# Altium PCB _PCB_2L.PcbDoc
Units mm, origin at the board's own origin, x right, y up, seen from the top; angles counter-clockwise.
Board outline 75 x 100 mm, 2 copper layers (Top Layer, Bottom Layer), stack 1.57 mm thick; 12 components, 1 nets, 12 pads, 0 vias.
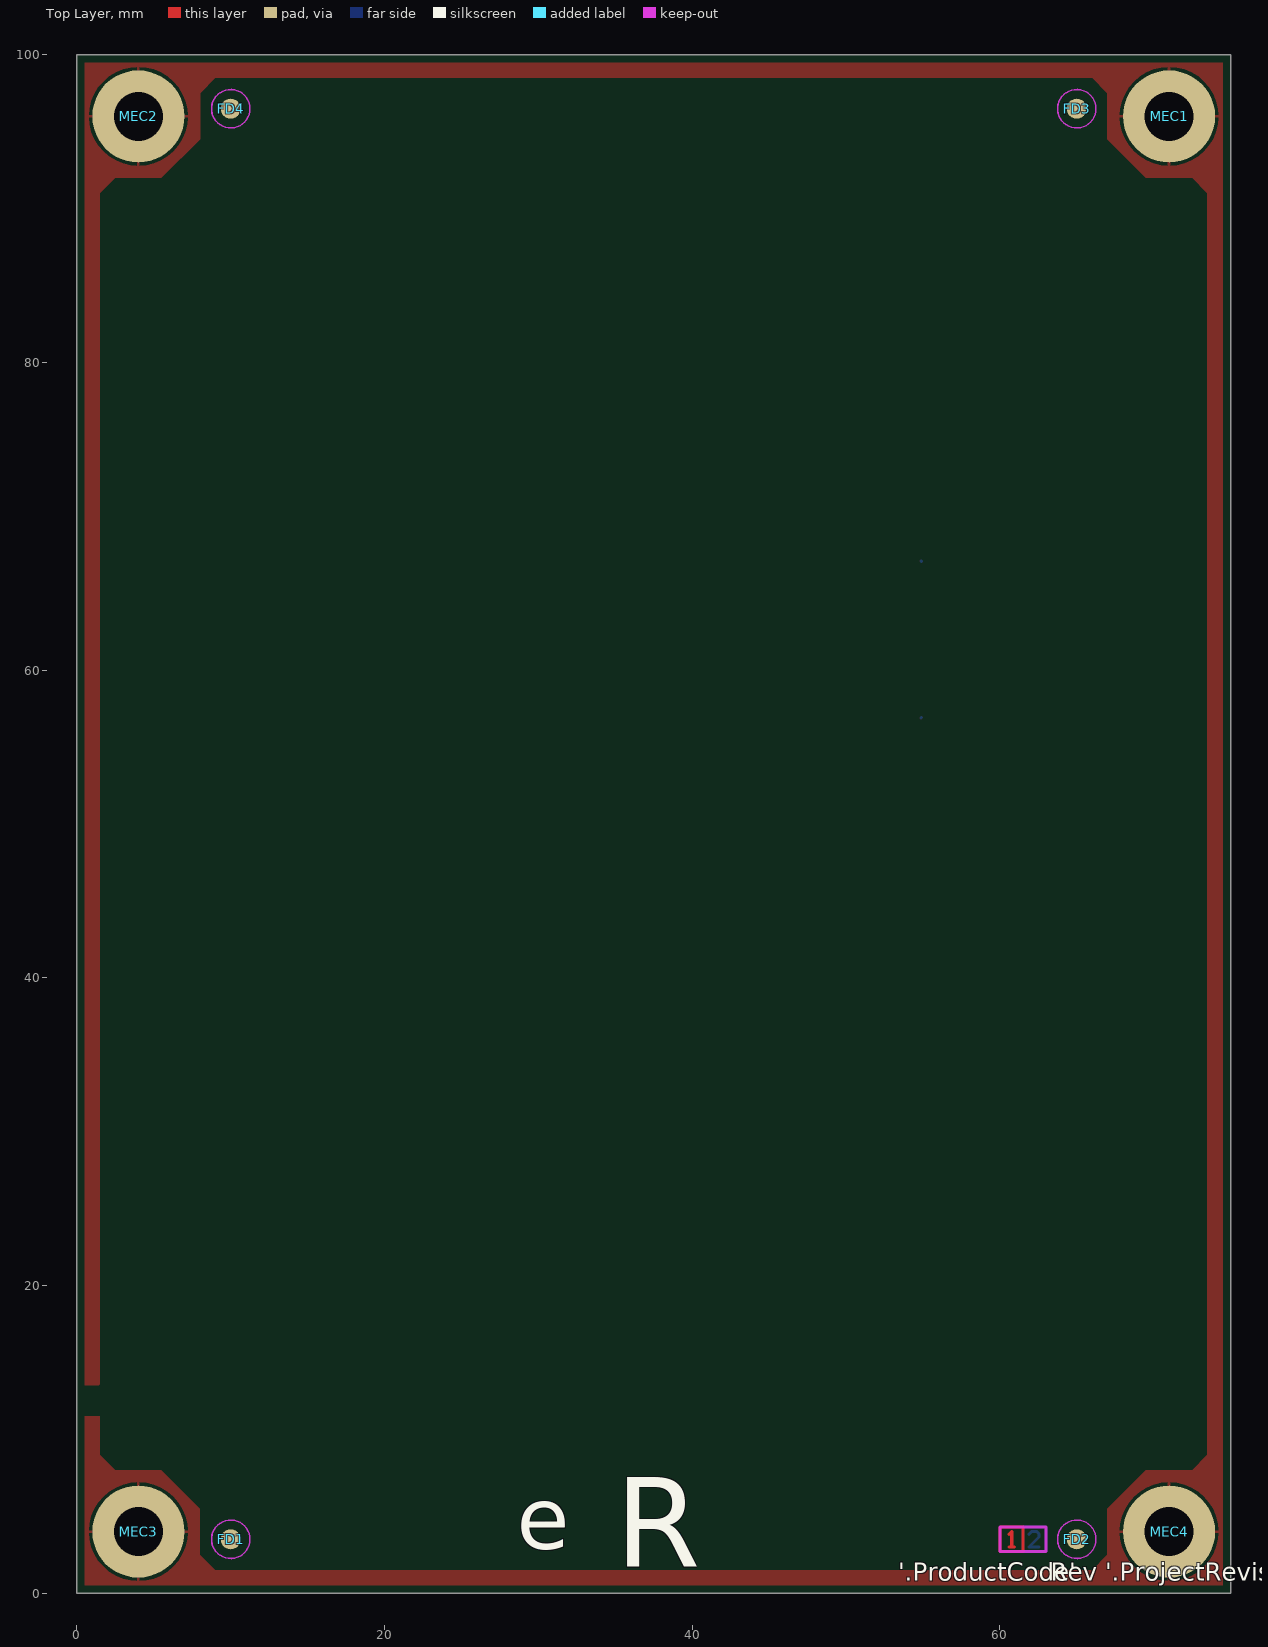
[diagram p0: Top Layer view]
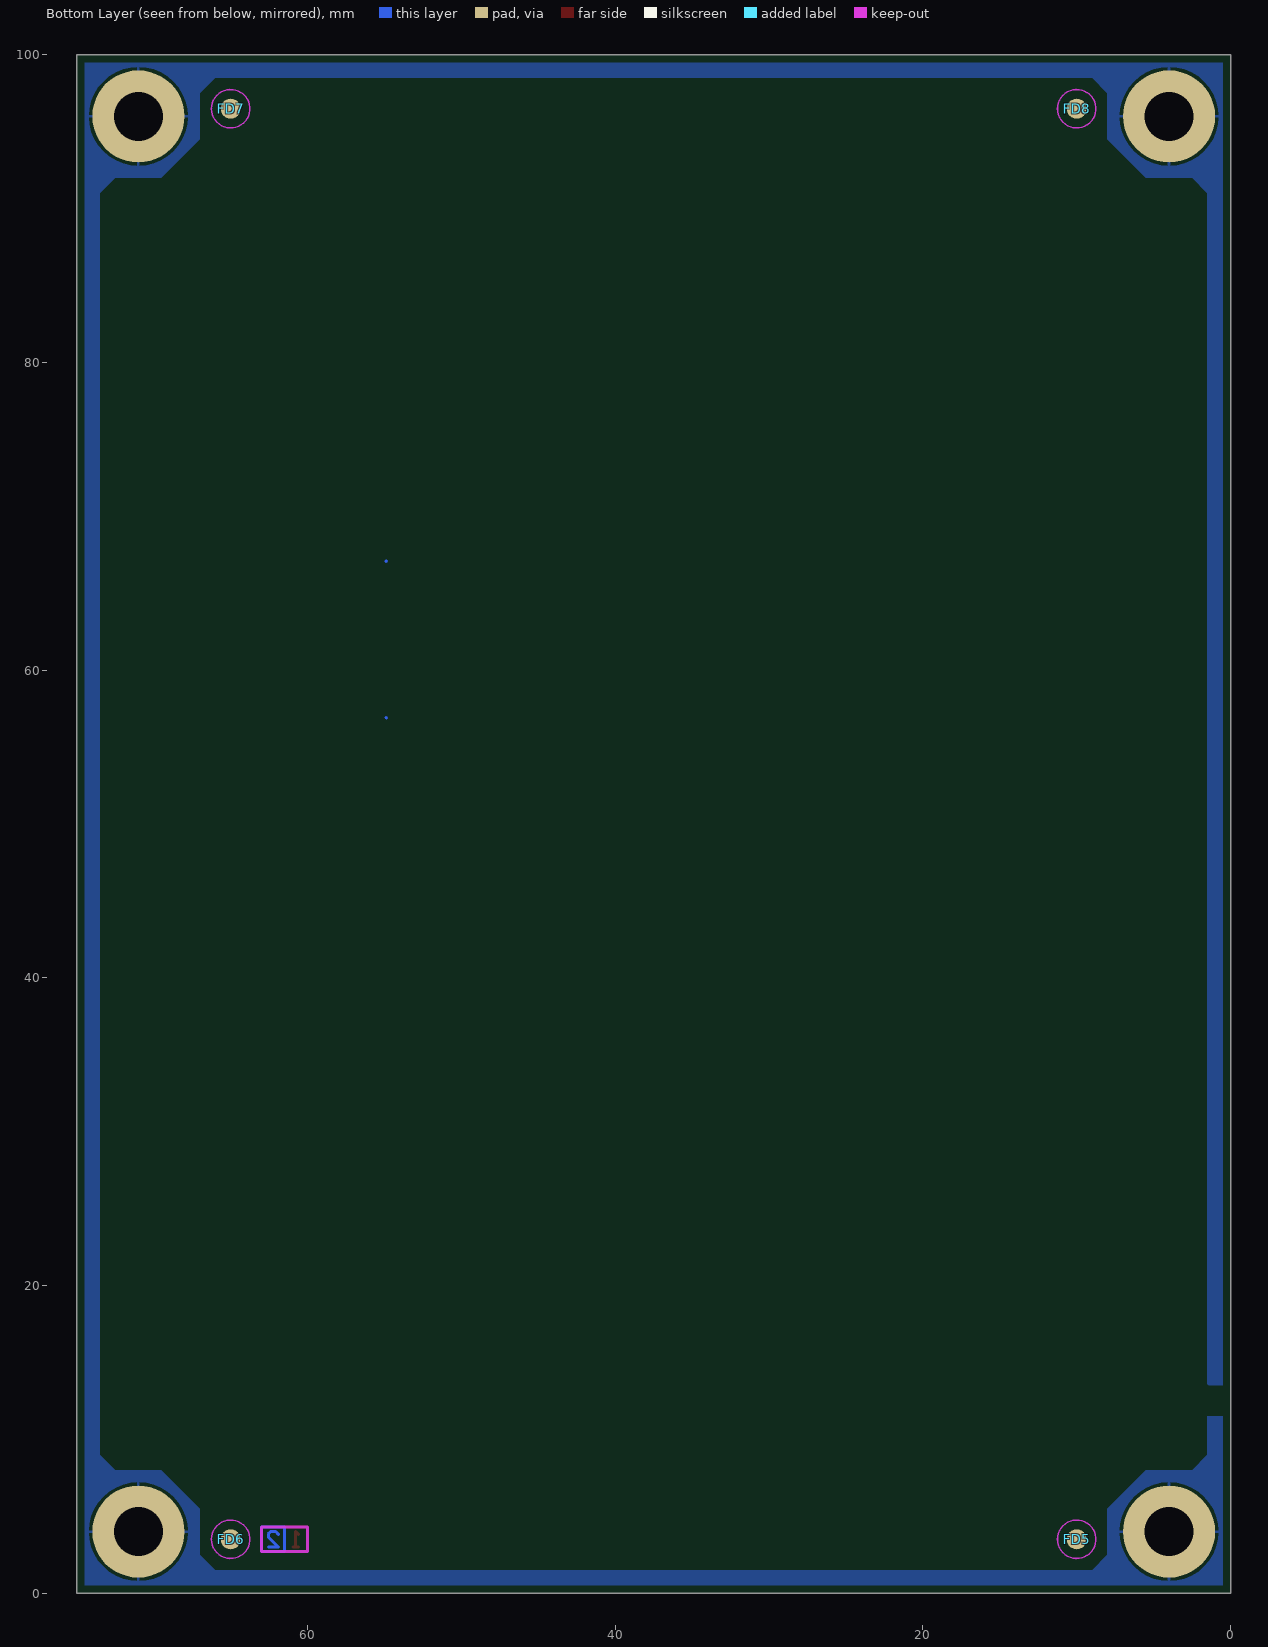
[diagram p1: Bottom Layer view, seen from below]

## Layer stack, top to bottom
Top Solder: solder mask 0.013, Solder Resist, Dk 3.5
Top Layer: signal copper 0.035
Dielectric 1: core 1.5, FR-4, Dk 4.2
Bottom Layer: signal copper 0.035
Bottom Solder: solder mask 0.013, Solder Resist, Dk 3.5

## Board outline
0,0 75,0 75,100 0,100

## Design rules (kind name [scope] priority, off if disabled: settings)
BoardOutlineClearance BoardOutlineClearance_layers [WithinRoom('layers_room')] p1: gap=0 ignorepadtopadclearanceinfootprint=FALSE
BoardOutlineClearance [All] p2: gap=0.5 ignorepadtopadclearanceinfootprint=FALSE
Clearance EARTH_Clearance [InNet('EARTH')] p1: gap=0.5 ignorepadtopadclearanceinfootprint=TRUE
Clearance [All] p2: gap=0.2 ignorepadtopadclearanceinfootprint=TRUE
DiffPairsRouting Diff_100ohmDiffPairsRouting [InDifferentialPairClass('Diff_100ohm')] p1: maxlimit=0.2 minlimit=0.2 mostfreqgap=0.2 toplayer_minwidth=0.16 toplayer_maxwidth=0.16 toplayer_prefwidth=0.16 bottomlayer_minwidth=0.16 bottomlayer_maxwidth=0.16 bottomlayer_prefwidth=0.16 maxuncoupledlength=12.7
DiffPairsRouting Diff_90ohmDiffPairsRouting [InDifferentialPairClass('Diff_90ohm')] p2: maxlimit=0.2 minlimit=0.2 mostfreqgap=0.2 toplayer_minwidth=0.2 toplayer_maxwidth=0.2 toplayer_prefwidth=0.2 bottomlayer_minwidth=0.2 bottomlayer_maxwidth=0.2 bottomlayer_prefwidth=0.2 maxuncoupledlength=5
DiffPairsRouting [All] p3: maxlimit=0.2 minlimit=0.2 mostfreqgap=0.2 toplayer_minwidth=0.16 toplayer_maxwidth=0.3 toplayer_prefwidth=0.2 bottomlayer_minwidth=0.16 bottomlayer_maxwidth=0.3 bottomlayer_prefwidth=0.2 maxuncoupledlength=12.7
HoleSize [All] p1: absolutevalues=TRUE maxlimit=6 minlimit=0.2 maxpercent=80.000 minpercent=20.000
HoleToHoleClearance [All] p1: gap=0.25 allowstackedmicrovias=TRUE
MatchedLengths ETH_iterpair_skew [InNetClass('ETH')] p1: tolerance=1.2 checknetsindiffpair=FALSE checkdiffpairvsdiffpair=TRUE checkxsignals=TRUE checkothers=TRUE
MatchedLengths GETH_interpair_skew [InNetClass('GETH')] p2: tolerance=15.2 checknetsindiffpair=FALSE checkdiffpairvsdiffpair=TRUE checkxsignals=TRUE checkothers=TRUE
MatchedLengths Diff_100ohm_intrapair_skew [InDifferentialPairClass('Diff_100ohm')] p3: tolerance=1.2 checknetsindiffpair=TRUE checkdiffpairvsdiffpair=FALSE checkxsignals=FALSE checkothers=FALSE
MatchedLengths Diff_90ohm_intrapair_skew [InDifferentialPairClass('Diff_90ohm')] p4: tolerance=1.2 checknetsindiffpair=TRUE checkdiffpairvsdiffpair=FALSE checkxsignals=FALSE checkothers=FALSE
MinimumSolderMaskSliver [All] p1: minsoldermaskwidth=0.01
PlaneClearance [All] p1: clearance=0.2
PlaneConnect [All] p1: pad.planeconnectstyle=Relief pad.reliefexpansion=0.2 pad.reliefentries=4 pad.reliefconductorwidth=0.2 pad.reliefairgap=0.2 via.planeconnectstyle=Direct via.reliefexpansion=0.2 via.reliefentries=4 via.reliefconductorwidth=0.2 via.reliefairgap=0.2
PolygonConnect [All] p1: thpad.connectstyle=Relief thpad.reliefconductorwidth=0.2 thpad.reliefentries=4 thpad.polygonreliefangle="90 Angle" thpad.airgapwidth=0.2 smdpad.connectstyle=Relief smdpad.reliefconductorwidth=0.2 smdpad.reliefentries=4 smdpad.polygonreliefangle="90 Angle" smdpad.airgapwidth=0.2 via.connectstyle=Direct via.reliefconductorwidth=0.2 via.reliefentries=4 via.polygonreliefangle="90 Angle" via.airgapwidth=0.2
RoomDefinition layers_room [All] p1: confinementstyle=ConfineOut formatcopy=TRUE lockcomponents=FALSE outline 173.5,-27.6 193.3,-27.6 193.3,-31.5 173.5,-31.5
RoutingVias [All] p1: holewidth=0.3 width=0.5 viastyle="Through Hole" minholewidth=0.2 minwidth=0.4 maxholewidth=1 maxwidth=1.6
SilkToSilkClearance [All] p1: silktosilkclearance=0.08
SilkToSolderMaskClearance [IsPad] p1: minsilkscreentomaskgap=0.06 clearancetoexposedcopper=TRUE
SolderMaskExpansion [All] p1: expansion=0.1
Width [All] p1: maxlimit=6 minlimit=0.16 preferedwidth=0.2
22 further rules are at their usual default settings.

## Classes and differential pairs
differential pair class Diff_100ohm: ETH_CONRX ETH_CONTX ETH_RJRX ETH_RJTX ETH_RX ETH_TX TXRX_A TXRX_B TXRX_C TXRX_D
differential pair class Diff_90ohm: USB0_D USB1_OTG_D

## Components (designator, comment, footprint, x,y, rotation, side; value= is the part's Value field where it differs from the comment)
FD1 "Fiducial 1.3" "Fiducial 1.3mm" 10,3.5 r0 top
FD2 "Fiducial 1.3" "Fiducial 1.3mm" 65,3.5 r270 top
FD3 "Fiducial 1.3" "Fiducial 1.3mm" 65,96.5 r270 top
FD4 "Fiducial 1.3" "Fiducial 1.3mm" 10,96.5 r0 top
FD5 "Fiducial 1.3" "Fiducial 1.3mm" 10,3.5 r180 bottom
FD6 "Fiducial 1.3" "Fiducial 1.3mm" 65,3.5 r180 bottom
FD7 "Fiducial 1.3" "Fiducial 1.3mm" 65,96.5 r270 bottom
FD8 "Fiducial 1.3" "Fiducial 1.3mm" 10,96.5 r180 bottom
MEC1 "M3" "M3 hole" 71,96 r0 top
MEC2 "M3" "M3 hole" 4,96 r0 top
MEC3 "M3" "M3 hole" 4,4 r0 top
MEC4 "M3" "M3 hole" 71,4 r0 top

## Footprints (in the part's own frame and the unit in brackets; to place one, negate y for a bottom-side part, rotate by r counter-clockwise, add the part's x,y. Pads: shape width x height; smd on the part's side, far side on the other; paste and mask are expansions set on the pad)
"Fiducial 1.3mm" [mm]
  round 1.3 smd mask+0.6: FD0(0,0)
  Top Layer keep-out circle w0.1: c0,0 r1.25
"M3 hole" [mm]
  round 6 hole 3.2: 0(0,0)

## Part data
FD1 FD2 FD3 FD4 FD5 FD6 FD7 FD8: "Fiducial 1.3mm"
MEC1 MEC2 MEC3 MEC4: library part "M3 hole", "M3 hole"

## Nets (pads, with @x,y where several pads share a name; then routed paths per layer and width w, separated by ;. In a path a pad name is that pad's centre, name@x,y a point inside that pad or via, vN(x,y) a via of type N, cw(c..) or ccw(c..) an arc to the next point about the centre after c; other vN are vias at no path point)
EARTH: MEC1.0 MEC2.0 MEC3.0 MEC4.0
pads on no net: FD1.FD0 FD2.FD0 FD3.FD0 FD4.FD0 FD5.FD0 FD6.FD0 FD7.FD0 FD8.FD0
copper on no net: | length 16.6
  Top Layer w0.2: 60.6,3 60.775,3 ; 60.6,3.825 60.775,4 60.775,3 ; 60.95,3 60.775,3 ; 60,2.7 60,4.3 61.5,4.3 61.5,2.7 60,2.7
  Bottom Layer w0.2: 54.88,56.904 54.896,56.92 ; 54.88,67.096 54.896,67.08 ; 61.9,3.825 62.075,4 62.4,4 62.55,3.85 62.55,3.65 61.9,3 62.55,3 ; 61.5,2.7 63,2.7 63,4.3 61.5,4.3 61.5,2.7

## Polygon pours and split planes (outlines as drawn)
EARTH on Top Layer "EARTH_top" (solid, remove dead copper, pour order 10): 0,100 75,100 75,0 0,0 0,11.5 1.499,11.5 1.501,8.999 2.5,8 5.5,8 8,5.5 8,2.5 9,1.5 66,1.5 67,2.5 67,5.5 69.5,8 72.5,8 73.5,9 73.5,91 72.499,92.001 69.499,92.001 67,94.5 67,97.5 66.005,98.5 9,98.5 8.009,97.509 8.009,94.509 5.5,92 2.5,92 1.501,91.001 1.501,13.5 0,13.5
EARTH on Bottom Layer "EARTH_bot" (solid, remove dead copper, pour order 46): 0,100 75,100 75,0 0,0 0,11.5 1.499,11.5 1.501,8.999 2.5,8 5.5,8 8,5.5 8,2.5 9,1.5 66,1.5 67,2.5 67,5.5 69.5,8 72.5,8 73.5,9 73.5,91 72.499,92.001 69.499,92.001 67,94.5 67,97.5 66.005,98.5 9,98.5 8.009,97.509 8.009,94.509 5.5,92 2.5,92 1.501,91.001 1.501,13.5 0,13.5

## Keep-outs
Keep-Out Layer:
  lines w0.2: 60,2.7 60,4.3 63,4.3 63,2.7 60,2.7
  text "'.Layer_Name'" at 174.2,-30.55 h2.5

## Other copper
Top Layer:
  text "'.Layer_Name'" at 174.2,-30.55 h2.5
Bottom Layer:
  text "'.Layer_Name'" at 174.2,-30.55 h2.5

## Silkscreen, mask and mechanical layers (free items; w line width, h text height)
Top Overlay:
  text "e" at 28.6,1.531 h7
  text "'.ProductCode'" at 53.4,0.4 h2
  text "Rev '.ProjectRevision'" at 63.3,0.4 h2
  text "R" at 35,-0.2 h10
  text "'.Layer_Name'" at 174.2,-30.55 h2.5
Bottom Overlay:
  text "'.Layer_Name'" at 174.2,-30.55 h2.5
Top Paste:
  text "'.Layer_Name'" at 174.2,-30.55 h2.5
Bottom Paste:
  text "'.Layer_Name'" at 174.2,-30.55 h2.5
Top Solder:
  rectangle: 59.9,2.5 63.2,4.5
  lines w0.2: 59.8,2.7 ccw(c60,2.7) 60,2.5 63,2.5 ccw(c63,2.7) 63.2,2.7 63.2,4.3 ccw(c63,4.3) 63,4.5 60,4.5 ccw(c60,4.3) 59.8,4.3 59.8,2.7
  text "'.Layer_Name'" at 174.2,-30.55 h2.5
Bottom Solder:
  rectangle: 59.9,2.5 63.2,4.5
  lines w0.2: 59.8,2.7 ccw(c60,2.7) 60,2.5 63,2.5 ccw(c63,2.7) 63.2,2.7 63.2,4.3 ccw(c63,4.3) 63,4.5 60,4.5 ccw(c60,4.3) 59.8,4.3 59.8,2.7
  text "p" at 32.5,2.5 h4
  text "'.Layer_Name'" at 174.2,-30.55 h2.5
Drill Guide:
  text "'.Layer_Name'" at 174.2,-30.55 h2.5
Board Edge:
  the board outline again, w0.2
Dimension:
  text "'.Layer_Name'" at 174.2,-30.55 h2.5
Route Tool:
  text "'.Layer_Name'" at 174.2,-30.55 h2.5
3D Body:
  text "'.Layer_Name'" at 174.2,-30.55 h2.5
Mechanical 8:
  text "'.Layer_Name'" at 174.2,-30.55 h2.5
Component Guard:
  text "'.Layer_Name'" at 174.2,-30.55 h2.5
Sheet:
  drawing of 353 lines, arcs and shapes, not listed
  text "1" at 5.246,142.611 h1.78
  text "2" at 77.89,142.611 h1.78
  text "3" at 151.042,142.611 h1.78
  text "4" at 223.94,142.611 h1.78
  text "Specifications" at 216.106,136.704 h1.52
  text "Material" at 193.881,134.101 h1.52
  text "Process" at 203.66,134.101 h1.52
  text "PCB" at 215.598,134.101 h1.52
  text "Silk" at 235.093,134.101 h1.52
  text "Mask" at 244.427,134.101 h1.52
  text "Copper" at 225.381,134.095 h1.52
  text "CEM" at 194.897,131.688 h1.52
  text "H.A.L." at 204.676,131.688 h1.52
  text "1,0mm" at 216.551,131.688 h1.52
  text "17um" at 226.33,131.688 h1.52
  text "LC" at 236.172,131.688 h1.52
  text "LC" at 245.507,131.688 h1.52
  text "FR-2" at 194.897,129.91 h1.52
  text "LeadFree" at 204.676,129.91 h1.52
  text "35um" at 226.33,129.91 h1.52
  text "LS" at 236.172,129.91 h1.52
  text "LS" at 245.507,129.91 h1.52
  text "1,6mm" at 216.589,129.892 h1.52
  text "FR-4" at 194.897,128.132 h1.52
  text "Flash G." at 204.676,128.132 h1.52
  text "70um" at 226.33,128.132 h1.52
  text "LC/LS" at 236.172,128.132 h1.52
  text "LC/LS" at 245.507,128.132 h1.52
  text "2,4mm" at 216.589,127.987 h1.52
  text "Spec." at 194.897,126.354 h1.52
  text "Spec." at 204.676,126.354 h1.52
  text "Spec." at 226.33,126.354 h1.52
  text "Spec." at 216.589,126.209 h1.52
  text "Color" at 235.093,125.782 h1.52
  text "Color" at 244.427,125.782 h1.52
  text "ACCORDING STACK UP" at 203.533,123.727 h1.27
  text "Special:" at 193.818,123.699 h1.52
  text "White" at 236.172,123.687 h1.52
  text "Green" at 245.443,123.687 h1.52
  text "Yellow" at 236.172,121.909 h1.52
  text "Blue" at 245.443,121.909 h1.52
  text "Tolerance:" at 193.818,121.21 h1.52
  text "Holes +-0,1mm" at 206.264,121.21 h1.52
  text "Espec." at 236.172,120.131 h1.52
  text "Espec." at 245.443,120.131 h1.52
  text "A" at -29.095,119.599 h1.78
  text "A" at 257.925,119.599 h1.78
  text "Mechanical +-0,2mm" at 206.264,119.496 h1.52
  text "Layer" at 139.828,112.763 h1.52
  text "Name" at 150.24,112.763 h1.52
  text "Material" at 173.856,112.763 h1.52
  text "Thickness" at 195.694,112.763 h1.52
  text "Constant" at 212.2,112.763 h1.52
  text "Board Layer Stack" at 226.674,112.763 h1.52
  text "Top Overlay" at 150.24,109.715 h1.52
  text "Top Solder" at 150.24,106.667 h1.52
  text "Solder Resist" at 173.856,106.667 h1.52
  text "0.013mm" at 195.694,106.667 h1.52
  text "3.5" at 212.2,106.667 h1.52
  text "1" at 139.828,103.619 h1.52
  text "Top Layer" at 150.24,103.619 h1.52
  text "Copper" at 173.856,103.619 h1.52
  text "0.035mm" at 195.694,103.619 h1.52
  text "Dielectric 1" at 150.24,100.571 h1.52
  text "FR-4" at 173.856,100.571 h1.52
  text "1.500mm" at 195.694,100.571 h1.52
  text "4.2" at 212.2,100.571 h1.52
  text "2" at 139.828,97.523 h1.52
  text "Bottom Layer" at 150.24,97.523 h1.52
  text "Copper" at 173.856,97.523 h1.52
  text "0.035mm" at 195.694,97.523 h1.52
  text "Bottom Solder" at 150.24,94.475 h1.52
  text "Solder Resist" at 173.856,94.475 h1.52
  text "0.013mm" at 195.694,94.475 h1.52
  text "3.5" at 212.2,94.475 h1.52
  text "Bottom Overlay" at 150.24,91.427 h1.52
  text "B" at -29.095,71.542 h1.78
  text "B" at 257.925,71.542 h1.78
  text "C" at -29.095,23.028 h1.78
  text "C" at 257.925,23.028 h1.78
  text "***" at 167,-21 h3.5
  text "D" at -29.095,-24.978 h1.78
  text "D" at 257.925,-24.978 h1.78
  text "Project:" at 167,-25.5 h2.5
  text "*" at 175,-25.5 h2.5
  text "Layer:" at 167,-30.5 h2.5
  text "Engineer:" at 167,-35.5 h2.5
  text "*" at 177,-35.5 h2.5
  text "Project Code:" at 225,-35.5 h2.5
  text ".ProductCode" at 239.5,-35.5 h2.5
  text "Date:" at 167,-40.5 h2.5
  text "'.Print_Date'" at 173,-40.5 h2.5
  text "Revision:" at 196,-40.5 h2.5
  text "'.ProjectRevision'" at 206,-40.5 h2.5
  text "Size:" at 225,-40.5 h2.5
  text "A4" at 231,-40.5 h2.5
  text "1" at 5.246,-45.349 h1.78
  text "2" at 77.89,-45.349 h1.78
  text "3" at 151.042,-45.349 h1.78
  text "4" at 223.94,-45.349 h1.78
Drill Drawing:
  lines w0.254: 113.935,81.024 115.628,81.024 115.628,82.717 113.935,82.717 113.935,81.024
  lines w0.381: 112.416,79.881 253.5,79.881 ; 112.416,83.691 253.5,83.691 ; 126.408,76.071 126.408,87.501 ; 138.597,76.071 138.597,87.501 ; 167.798,76.071 167.798,87.501 ; 180.648,76.071 180.648,87.501 ; 199.286,76.071 199.286,87.501 ; 237.375,76.071 237.375,87.501 ; 112.416,76.071 253.5,76.071 253.5,87.501 112.416,87.501 112.416,76.071
  text "Symbol" at 114.702,84.834 h1.83
  text "Count" at 127.551,84.834 h1.83
  text "Hole Size" at 139.74,84.834 h1.83
  text "Plated" at 168.941,84.834 h1.83
  text "Hole Type" at 181.791,84.834 h1.83
  text "Drill Layer Pair" at 200.429,84.834 h1.83
  text "Via/Pad" at 238.518,84.834 h1.83
  text "4" at 127.551,81.024 h1.52
  text "3.200mm (125.98mil)" at 139.74,81.024 h1.52
  text "PTH" at 168.941,81.024 h1.52
  text "Round" at 181.791,81.024 h1.52
  text "Top Layer - Bottom Layer" at 200.429,81.024 h1.52
  text "Pad" at 238.518,81.024 h1.52
  text "4 Total" at 127.551,77.214 h1.52
  text "'.Layer_Name'" at 174.2,-30.55 h2.5
  text "'.Layer_Name'" at 174.2,-30.55 h2.5

## Dimensions
4,4 to 4,96 on Dimension
4,4 to 71,4 on Dimension
0,100 to 0,0 on Dimension
0,100 to 75,100 on Dimension